# Altium PCB PCB_ClockLed.PcbDoc
Units mil, origin at the board's own origin, x right, y up, seen from the top; angles counter-clockwise.
Board outline 6000 x 4000 mil, 2 copper layers (Top Layer, Bottom Layer); 70 components, 62 nets, 260 pads, 2 vias.
Unrouted connection lines stored in the file: 184.
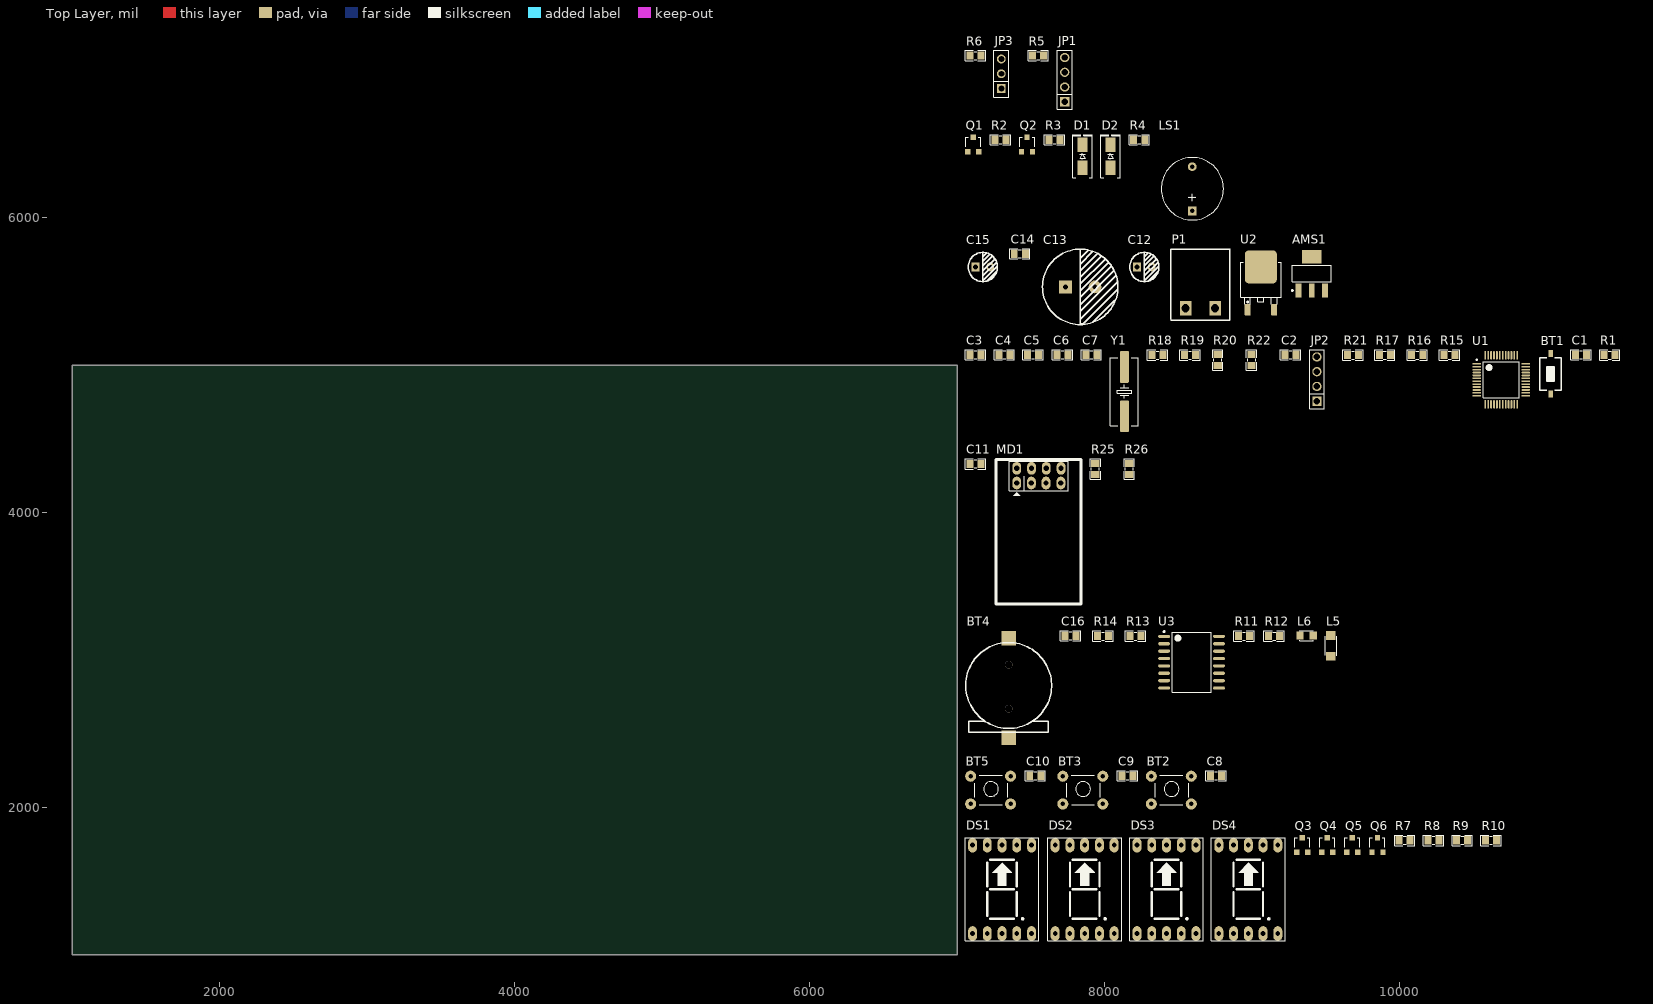
[diagram p0: Top Layer view]
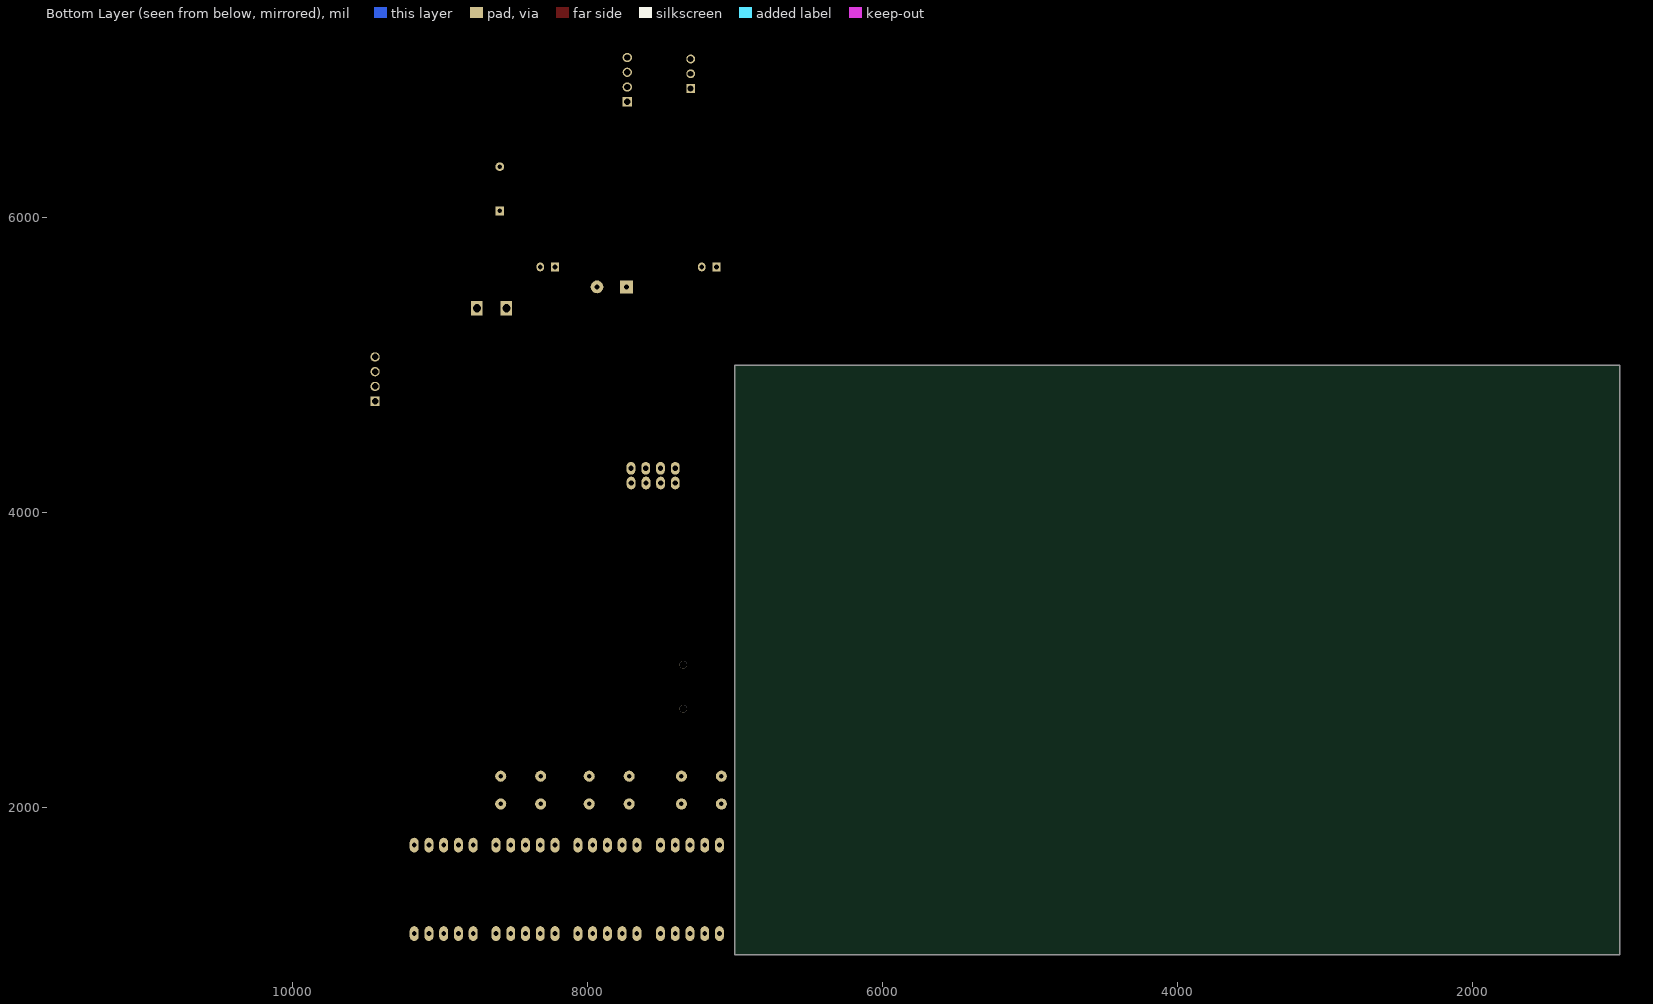
[diagram p1: Bottom Layer view, seen from below]

## Layer stack, top to bottom
Top Solder: solder mask 0.4, Solder Resist, Dk 3.5
Top Layer: signal copper 1.4
Dielectric 1: dielectric 12.6, FR-4, Dk 4.8
Bottom Layer: signal copper 1.4
Bottom Solder: solder mask 0.4, Solder Resist, Dk 3.5

## Board outline
1000,1000 7000,1000 7000,5000 1000,5000

## Design rules (kind name [scope] priority, off if disabled: settings)
Clearance [All] p1: gap=10 ignorepadtopadclearanceinfootprint=FALSE except(0: Arc-Hole Track-Hole SMDPad-Hole THPad-Hole Via-Hole Fill-Hole Poly-Hole Region-Hole Text-Hole)
PolygonConnect [All] p1: connectstyle=Relief reliefconductorwidth=10 reliefentries=4 polygonreliefangle="90 Angle" airgapwidth=10
RoutingVias [All] p1: holewidth=28 width=50 viastyle="Through Hole" minholewidth=28 minwidth=50 maxholewidth=28 maxwidth=50
SolderMaskExpansion [All] p1: expansion=4 istentingtop=FALSE
Width [All] p1: maxlimit=10 minlimit=10 preferedwidth=10
30 further rules are at their usual default settings.

## Classes and differential pairs
component class SenSor_ClockLed: JP1 JP3 R5 R6
component class Relay_ClockLed: D1 D2 LS1 Q1 Q2 R2 R3 R4 RL1
component class Power_ClockLed: AMS1 C12 C13 C14 C15 P1 U2
component class MCU_Clock_Led: BT1 C1 C2 C3 C4 C5 C6 C7 JP2 R1 R15 R16 R17 R18 R19 R20 R21 R22 U1 Y1
component class ESP8266_ClockLed: C11 MD1 R25 R26
component class DS3231_ClockLed: BT4 C16 L5 L6 R11 R12 R13 R14 U3
component class Button_ClockLed: BT2 BT3 BT5 C8 C9 C10
component class 7SEG_ClockLed: DS1 DS2 DS3 DS4 Q3 Q4 Q5 Q6 R7 R8 R9 R10

## Components (designator, comment, footprint, x,y, rotation, side; value= is the part's Value field where it differs from the comment)
AMS1 "AMS1117-3.3V" SOT223 9405,5620 r0 top value="AMS1117-3.3V SOT223"
BT1 "Nut Nhan 2 Chan SMD 3x6x2.5" "Nut Nhan 2 Chan SMD 3x6x2.5" 11025,4940 r90 top
BT2 "Nut Nhan 4 Chan Cam 6x6" "Nut Nhan 4 Chan Cam 6x6" 8330,2220 r0 top
BT3 "Nut Nhan 4 Chan Cam 6x6" "Nut Nhan 4 Chan Cam 6x6" 7730,2220 r0 top
BT4 "CR1220 SMD" "DE PIN CR1220" 7350,2810 r0 top
BT5 "Nut Nhan 4 Chan Cam 6x6" "Nut Nhan 4 Chan Cam 6x6" 7105,2220 r0 top
C1 "104" "tu 0805" 11230,5070 r0 top
C2 "22pF" "tu 0805" 9260,5070 r0 top
C3 "104" "tu 0805" 7125,5070 r0 top
C4 "104" "tu 0805" 7320,5070 r0 top
C5 "104" "tu 0805" 7515,5070 r0 top
C6 "104" "tu 0805" 7715,5070 r0 top
C7 "22pF" "tu 0805" 7910,5070 r0 top
C8 "104" "tu 0805" 8755,2215 r0 top
C9 "104" "tu 0805" 8155,2215 r0 top
C10 "104" "tu 0805" 7530,2215 r0 top
C11 "104" "tu 0805" 7125,4330 r0 top
C12 "0.33uF" "tu hoa 5mm" 8270,5665 r0 top
C13 "10uF" "tu hoa 13mm" 7835,5530 r0 top
C14 "104" "tu 0805" 7425,5755 r0 top
C15 "22uF" "tu hoa 5mm" 7175,5665 r0 top
C16 "104" "tu 0805" 7770,3165 r0 top
D1 "M7" "DIODE SMA" 7850,6415 r90 top
D2 "M7" "DIODE SMA" 8040,6415 r90 top
DS1 "7SEG S" 7SEGS 7105,1145 r0 top value="LED 7S SEG"
DS2 "7SEG S" 7SEGS 7665,1145 r0 top value="LED 7S SEG"
DS3 "7SEG S" 7SEGS 8220,1145 r0 top value="LED 7S SEG"
DS4 "7SEG S" 7SEGS 8775,1145 r0 top value="LED 7S SEG"
JP1 "JP 1x4 2.54" "JP 1x4 DT" 7730,6785 r90 top
JP2 "JP 1x4 2.54" "JP 1x4 DT" 9440,4755 r90 top
JP3 "JP 1x3 2.54" "JP 1x3 CT" 7300,6875 r90 top
L5 "LED 0805" LED-1206-Yellow 9535,3025 r90 top
L6 "LED 0805" LED-0805-Blue 9325,3165 r0 top
LS1 "Coi Chip Speaker" "Coi Chip Speacker" 8595,6045 r90 top
MD1 "ESP8266 Module" "ESP2866 Module" 7405,4200 r0 top
P1 "CON 2 EDG5.08" "CON 2 2EDG5.08" 8550,5385 r0 top
Q1 "HF" SOT23 7110,6495 r0 top value=C9014
Q2 "HF" SOT23 7475,6495 r0 top value=C9014
Q3 "HF" SOT23 9340,1745 r0 top value=C9014
Q4 "HF" SOT23 9510,1745 r0 top value=C9014
Q5 "HF" SOT23 9680,1745 r0 top value=C9014
Q6 "HF" SOT23 9850,1745 r0 top value=C9014
R1 "10k" "tro smd 0805" 11425,5070 r0 top
R2 "100R" "tro smd 0805" 7295,6530 r0 top
R3 "100R" "tro smd 0805" 7660,6530 r0 top
R4 "100R" "tro smd 0805" 8235,6530 r0 top
R5 "4.7k" "tro smd 0805" 7550,7100 r0 top
R6 "4.7k" "tro smd 0805" 7125,7100 r0 top
R7 "100R" "tro smd 0805" 10035,1780 r0 top
R8 "100R" "tro smd 0805" 10230,1780 r0 top
R9 "100R" "tro smd 0805" 10425,1780 r0 top
R10 "100R" "tro smd 0805" 10620,1780 r0 top
R11 "4.7k" "tro smd 0805" 8945,3165 r0 top
R12 "4.7k" "tro smd 0805" 9150,3165 r0 top
R13 "4.7k" "tro smd 0805" 8210,3165 r0 top
R14 "4.7k" "tro smd 0805" 7990,3165 r0 top
R15 "10k" "tro smd 0805" 10340,5070 r0 top
R16 "10k" "tro smd 0805" 10120,5070 r0 top
R17 "10k" "tro smd 0805" 9900,5070 r0 top
R18 "10k" "tro smd 0805" 8360,5070 r0 top
R19 "10k" "tro smd 0805" 8580,5070 r0 top
R20 "10k" "tro smd 0805" 8765,5035 r90 top
R21 "10k" "tro smd 0805" 9685,5070 r0 top
R22 "10k" "tro smd 0805" 8995,5035 r90 top
R25 "10k" "tro smd 0805" 7935,4295 r90 top
R26 "10k" "tro smd 0805" 8165,4295 r90 top
U1 "STM32F103xx_LQFP48" STM32_LQPF48 10690,4900 r0 top
U2 "78M05 SMD TO252" TO252 9060,5520 r0 top
U3 "DS3231 SMD" "SOIC 16" 8590,2985 r0 top
Y1 "16Mhz" "Thach Anh 2 chan SMD" 8135,4820 r90 top value=4Mhz

## Footprints (in the part's own frame and the unit in brackets; to place one, negate y for a bottom-side part, rotate by r counter-clockwise, add the part's x,y. Pads: shape width x height; smd on the part's side, far side on the other; paste and mask are expansions set on the pad)
7SEGS [mil] "DIP 10 Leads; Body 12 x 15 mm; Pitch 0.5 mm"
  oval 60x100 hole 32: 1(0,0) 2(100,0) 3(200,0) 4(300,0) 5(400,0) 6(400,600) 7(300,600) 8(200,600) 9(100,600) 10(0,600)
  silkscreen extent -50,-50 450,650, body extent -50,-75 450,675, height 316
"Coi Chip Speacker" [mm]
  rect 1.5x1.5 hole 0.8: 1(0,0)
  round 1.5 hole 0.8: 2(7.62,0.013)
  silkscreen extent -1.55,-5.38 9.18,5.36, body extent -2.22,-6 13.24,6, height 4.5
"CON 2 2EDG5.08" [mm]
  rect 2x2.5 hole 1.4: 1(0,0) 2(5.08,0)
  silkscreen extent -2.54,-2.03 7.62,10.21, body extent -2.5,-1.75 7.58,10.25, height 3.15
"DE PIN CR1220" [mm]
  rect 2.5x2.5 smd: 1(0,-8.6) 2(0,8.6)
  silkscreen extent -7.39,-7.6 7.4,7.84, body extent -7.39,-9.42 7.36,9.38, height 4.27
"DIODE SMA" [mm] "SMA"
  rect 2.5x1.7 smd: 1(-2,0) 2(2,0)
  silkscreen extent -3.68,-1.65 3.75,1.65, body extent -2.6,-1.37 2.6,1.37, height 2.4
"ESP2866 Module" [mil]
  oval 60x86 hole 36: 1(0,0) 2(99,0) 3(198,0) 4(299,0) 5(0,100) 6(100,100) 7(199.5,100) 8(300,100)
  silkscreen extent -140,-820 435,159, body extent -137,-817 433,159, height 231
"JP 1x3 CT" [mm]
  rect 1.52x1.52 hole 1.02: 1(0,0)
  round 1.52 hole 1.02: 2(2.54,0) 3(5.08,0)
  silkscreen extent -1.52,-1.27 6.6,1.27, body extent -1.52,-1.25 6.6,1.25, height 8.51
"JP 1x4 DT" [mm] "4 pins, 1 row, straight, gold plating"
  rect 1.6x1.6 hole 1.1: 1(0,0)
  round 1.6 hole 1.1: 2(2.54,0) 3(5.08,0) 4(7.62,0)
  silkscreen extent -1.27,-1.27 8.89,1.27, body extent -1.27,-1.27 8.89,1.27, height 8.54
LED-0805-Blue [mil]
  rect 50x55 smd: 1(0,0) 2(90,0)
  silkscreen extent 0,-35 90,35, body extent 5,-25 85,25, height 43
LED-1206-Yellow [mil]
  rect 60x65 smd: 1(0,0) 2(142,0)
  silkscreen extent 6,-40 136,40, body extent 7,-31 133,32, height 43
"Nut Nhan 2 Chan SMD 3x6x2.5" [mm] "Switch SMD type"
  rect 1.2x0.8 smd: 1(-3.5,0) 2(3.5,0)
  silkscreen extent -2.82,-1.85 2.82,1.85, body extent -3.05,-1.85 3.05,1.85, height 2.5
"Nut Nhan 4 Chan Cam 6x6" [mil] "SW button 4pin, 250 x250 mil"
  round 75 hole 31: 1(-13,-8) 1(258,-8) 2(-13,-196) 2(258,-196)
  silkscreen extent 15,-215 240,0, body extent -31,-225 281,19, height 276
"SOIC 16" [mm] "SOIC, 16-Leads, Body 10.30x7.50mm, Pitch 1.27mm, IPC Medium Density"
  oval 2.032x0.55 smd: 1(-4.725,4.445) 2(-4.725,3.175) 3(-4.725,1.905) 4(-4.725,0.635) 5(-4.725,-0.635) 6(-4.725,-1.905) 7(-4.725,-3.175) 8(-4.725,-4.445) 9(4.725,-4.445) 10(4.725,-3.175) 11(4.725,-1.905) 12(4.725,-0.635) 13(4.725,0.635) 14(4.725,1.905) 15(4.725,3.175) 16(4.725,4.445)
  silkscreen extent -4.85,-5.15 3.35,5.39, body extent -5.15,-5.17 5.16,5.16, height 2.48
SOT23 [mm] "SOT23"
  rect 0.9x0.95 smd: 1(-0.95,-1.25) 2(0,1.25)
  rect 0.9x0.95 smd mask+0: 3(0.95,-1.25)
  silkscreen extent -1.3,-0.38 1.3,1.25, body extent -1.52,-1.23 1.48,1.27, height 1.06
SOT223 [mm]
  rect 1x2.4 smd: 1(-2.3,-2.9) 2(0,-2.9) 3(2.3,-2.9)
  rect 3.3x2.4 smd: 4(0,2.9)
  silkscreen extent -3.47,-3.02 3.35,1.4, body extent -3.25,-3.56 3.25,3.4, height 1.68
STM32_LQPF48 [mm]
  oval 1.45x0.3 smd: 1(-4.225,2.75) 2(-4.225,2.25) 3(-4.225,1.75) 4(-4.225,1.25) 5(-4.225,0.75) 6(-4.225,0.25) 7(-4.225,-0.25) 8(-4.225,-0.75) 9(-4.225,-1.25) 10(-4.225,-1.75) 11(-4.225,-2.25) 12(-4.225,-2.75) 25(4.225,-2.75) 26(4.225,-2.25) 27(4.225,-1.75) 28(4.225,-1.25) 29(4.225,-0.75) 30(4.225,-0.25) 31(4.225,0.25) 32(4.225,0.75) 33(4.225,1.25) 34(4.225,1.75) 35(4.225,2.25) 36(4.225,2.75)
  oval 0.3x1.45 smd: 13(-2.75,-4.225) 14(-2.25,-4.225) 15(-1.75,-4.225) 16(-1.25,-4.225) 17(-0.75,-4.225) 18(-0.25,-4.225) 19(0.25,-4.225) 20(0.75,-4.225) 21(1.25,-4.225) 22(1.75,-4.225) 23(2.25,-4.225) 24(2.75,-4.225) 37(2.75,4.225) 38(2.25,4.225) 39(1.75,4.225) 40(1.25,4.225) 41(0.75,4.225) 42(0.25,4.225) 43(-0.25,4.225) 44(-0.75,4.225) 45(-1.25,4.225) 46(-1.75,4.225) 47(-2.25,4.225) 48(-2.75,4.225)
  silkscreen extent -4.35,-3.1 3.1,3.57, body extent -4.5,-4.5 4.5,4.5, height 1.6
"Thach Anh 2 chan SMD" [mm] "SMD Crystal HC49/US-SM package"
  round 0.508 on Mech15: 0(0,0)
  rrect25% 5.5x1.5 smd: 1(-4.25,0) 2(4.25,0)
  silkscreen extent -5.84,-2.41 5.84,2.41, body extent -6.4,-2.41 6.4,2.42, height 4.29
TO252 [mm] "TO252"
  round 0.5 on Mech15: 0(0,0)
  rrect25% 1x2 smd: 1(-2.285,-3.7) 3(2.285,-3.7)
  rrect25% 5.5x5.7 smd: 2(0,3.7)
  silkscreen extent -3.5,-2.7 3.5,4.5, body extent -3.3,-3.95 3.3,5.76, height 2.31
"tro smd 0805" [mm]
  rect 1.2x1.4 smd: 1(-0.946,-0.061) 2(0.954,-0.061)
  silkscreen extent -1.75,-0.97 1.75,0.84, body extent -1.56,-0.76 1.44,0.64, height 0.53
"tu 0805" [mm] "Compoment SMD 80x50mil"
  rect 1.2x1.4 smd: 1(-0.946,-0.003) 2(0.954,-0.003)
  silkscreen extent -1.75,-0.89 1.75,0.89, body extent -1.01,-0.64 1.01,0.63, height 0.61
"tu hoa 5mm" [mm]
  rect 1.3x1.5 hole 0.8: 1(-1.27,0)
  oval 1.3x1.5 hole 0.8: 2(1.27,0)
  silkscreen extent -2.51,-2.51 2.51,2.51, body extent -3.12,-3.18 3.23,3.18, height 14.55
"tu hoa 13mm" [mm]
  rect 2.2x2.2 hole 0.9: 1(-2.54,0)
  round 2.2 hole 0.9: 2(2.54,0)
  silkscreen extent -6.5,-6.5 6.5,6.5, body extent -6.25,-6.25 6.26,6.25, height 23.02

## Part data
AMS1: library part "AMS1117 SMD", "Dán", Chung_Loai=Dán, Don_Vi=Con, Ma_Hang=MH000596
BT2 BT3 BT5: "Nut Nhan 4 Chan 6x6mm", Ma_Hang=MH004584, Ten="Nút Nhấn 4 Chân 6x6x5MM DIP"
BT4: library part "De pin CR1220 SMD", Ma_Hang=MH000833, Ten="Đế PIN CR1220 SMD"
C1 C3 C4 C5 C6 C8 C9 C10 C11 C14 C16: library part "Tu 0805 104 50V 10%", "Dán", Chung_Loai=Dán, Don_Vi=Con, Ma_Hang=MH004551, So_Chan=2, Ten_Linh_Kien="Tụ 0805 104-100nF 10% 50V"
C2 C7: library part "Tu 0805 22pF 50V 10%", "Dán", Chung_Loai=Dán, Don_Vi=Con, Ma_Hang=MH004560, So_Chan=2, Ten_Linh_Kien="Tụ 0805 22P 10% 50V"
C12: library part "Tu Hoa 0.33uF 50V 5x11", "Cắm", Chung_Loai=Cắm, Don_Vi=Con, Ma_Hang=MH004655, So_Chan=2, Ten_Linh_Kien="Tụ Hóa 0.33uF 50V 5x11MM"
C13: library part "Tu Hoa 10uF 450V 13x20", "Cắm", Chung_Loai=Cắm, Don_Vi=Con, Ma_Hang=MH003950, So_Chan=2, Ten_Linh_Kien="Tụ Hóa 10uF 450V 13x20MM"
C15: library part "Tu Hoa 22uF 35V 5x11", "Cắm", Chung_Loai=Cắm, Don_Vi=Con, Ma_Hang=MH001350, So_Chan=2, Ten_Linh_Kien="Tụ Hóa 22uF 35V 5x11MM"
D1 D2: library part "Diode M7 ( 4007 )", "Dán", Chung_Loai=Dán, Don_Vi=Con, Ma_Hang=MH000944, Ten_Linh_Kien="Diode M7 1N4007 SMD 1A 1000V"
DS1 DS2 DS3 DS4: library part LED7S, "Single 7 Seg Dipslay"
JP1 JP2: library part "JP 1x4 2.54 Duc Thang", "Cắm", Chung_Loai=Cắm, Don_Vi=Con, Ma_Hang=MH000903, Ten_Linh_Kien="Jump Đơn Đực 2.54MM 1x40P Thẳng 11MM"
JP3: library part "JP 1x3 2.54 Cai Thang", "Cắm", Chung_Loai=Cắm, Don_Vi=Con, Ma_Hang=MH004006, Ten_Linh_Kien="Jump Đơn Cái 2.54MM 1x20P Thẳng"
L5: library part "LED 1206 Vang", "Dán", Chung_Loai=Dán, Don_Vi=Con, Ma_Hang=MH002331, Ten_Linh_Kien="LED1206 Màu Vàng (Yellow)"
L6: library part "LED 0805 Xanh Duong", "Dán", Chung_Loai=Dán, Don_Vi=Con, Ma_Hang=MH002327, Ten_Linh_Kien="LED 0805 Màu Xanh Dương (Blue)"
LS1: "Còi chip"
P1: "Cắm", Chung_Loai=Cắm, Don_Vi=Con, Ma_Hang=MH000759, Ten_Linh_Kien="CON 2 2EDG5.08-2P 5.08MM ( Xanh Cong)"
Q1 Q2 Q3 Q4 Q5 Q6: library part "C1815 HF SMD", "NPN transistor"
R1 R15 R16 R17 R18 R19 R20 R21 R22 R25 R26: library part "Tro 0805 5% 10k", "Dán", Chung_Loai=Dán, Don_Vi=Con, Ma_Hang=MH005239, So_Chan=2, Ten_Linh_Kien="Trở 0805 5% 10k"
R2 R3 R4 R7 R8 R9 R10: library part "Tro 0805 5% 100R", "Dán", Chung_Loai=Dán, Don_Vi=Con, Ma_Hang=MH005251, So_Chan=2, Ten_Linh_Kien="Trở 0805 5% 100R"
R5 R6 R11 R12 R13 R14: library part "Tro 0805 5% 4.7k", "Dán", Chung_Loai=Dán, Don_Vi=Con, Ma_Hang=MH005307, So_Chan=2, Ten_Linh_Kien="Trở 0805 5% 4.7k"
U2: "Dán", Chung_Loai=Dán, Don_Vi=Con, Ma_Hang=MH001917, Ten_Linh_Kien="78M05 TO252"
U3: "SOIC"
Y1: library part "Thach Anh 2 chan SMD", "Crystal For all Crystal 2pin."
BT1: Ma_Hang=MH001036, Ten="Nút Nhấn 2 Chân 3x6x2.5MM SMD"
U1: ComponentLink1Description="Manufacturer Link", ComponentLink1URL=www.st.com/stm32, ComponentLink2Description=Datasheet, ComponentLink2URL=http://www.st.com/stonline/products/literature/ds/13587.pdf, DatasheetVersion="rev6, Mar-2008", PackageDescription="48-Pin Low-Profile Quad Flat Pack, 7 x 7 mm Body, 0.5 mm Pitch (LQFP48)", PackageReference=LQFP48, PackageVersion=Mar-2008, Published=30-May-2008, Publisher="Altium Limited"

## Via types
v1: diameter 50, hole 50, Top Layer to Bottom Layer, 2 vias

## Nets (pads, with @x,y where several pads share a name; then routed paths per layer and width w, separated by ;. In a path a pad name is that pad's centre, name@x,y a point inside that pad or via, vN(x,y) a via of type N, cw(c..) or ccw(c..) an arc to the next point about the centre after c; other vN are vias at no path point)
3.3V: AMS1.2 AMS1.4 C3.1 C4.1 C5.1 C6.1 C11.2 C15.1 JP1.1 JP2.1 JP3.1 L5.2 L6.2 MD1.5 MD1.6 MD1.7 Q3.3 Q4.3 Q5.3 Q6.3 R5.1 R6.1 R11.2 R12.2 R25.1 R26.1 U1.9 U1.24 U1.36 U1.48 U3.2
5V: D1.2 D2.2 LS1.1
+5: AMS1.3 C13.1 C14.1 U2.3
+12: C12.1 P1.1 R4.2 U2.1
GND: AMS1.1 BT1.1 BT2.1 BT2.2 BT3.2 BT4.2 BT5.2 C1.2 C2.1 C3.2 C4.2 C5.2 C6.2 C7.1 C8.1 C8.2 C9.2 C10.1 C11.1 C12.2 C13.2 C14.2 C15.2 C16.2 JP1.4 JP2.4 JP3.3 MD1.4 P1.2 Q1.2 Q2.2 R1.2 U1.8 U1.23 U1.26 U1.35 U1.47 U2.2 U3.5 U3.6 U3.7 U3.8 U3.9 U3.10 U3.11 U3.12 U3.13
NetBT3_1: BT3.1 C9.1 U1.27
NetBT4_1: BT4.1 C16.1 U3.14
NetBT5_1: BT5.1 C10.2 U1.28
NetD1_1: D1.1 Q1.3
NetD2_1: D2.1 LS1.2 Q2.3
NetDS1_1: DS1.1 DS2.1 DS3.1 DS4.1 R19.1
NetDS1_2: DS1.2 DS2.2 DS3.2 DS4.2 R18.1
NetDS1_3: DS1.3 DS1.8 Q3.2
NetDS1_4: DS1.4 DS2.4 DS3.4 DS4.4 R17.1
NetDS1_5: DS1.5 DS2.5 DS3.5 DS4.5 R22.1
NetDS1_6: DS1.6 DS2.6 DS3.6 DS4.6 R16.1
NetDS1_7: DS1.7 DS2.7 DS3.7 DS4.7 R15.1
NetDS1_9: DS1.9 DS2.9 DS3.9 DS4.9 R20.1
NetDS1_10: DS1.10 DS2.10 DS3.10 DS4.10 R21.1
NetDS2_3: DS2.3 DS2.8 Q4.2
NetDS3_3: DS3.3 DS3.8 Q5.2
NetDS4_3: DS4.3 DS4.8 Q6.2
NetJP1_2: JP1.2 R5.2 U1.33
NetJP3_2: JP3.2 R6.2 U1.32
NetL5_1: L5.1 L6.1 R13.1 R14.1
NetMD1_1: MD1.1 U1.30
NetMD1_2: MD1.2 R25.2
NetMD1_3: MD1.3 R26.2
NetMD1_8: MD1.8 U1.31
NetQ1_1: Q1.1 R2.2
NetQ2_1: Q2.1 R3.2
NetQ3_1: Q3.1 R7.2
NetQ4_1: Q4.1 R8.2
NetQ5_1: Q5.1 R9.2
NetQ6_1: Q6.1 R10.2
NetR1_1: R1.1 U1.44
NetR2_1: R2.1 U1.22
NetR3_1: R3.1
NetR4_1: R4.1
NetR7_1: R7.1 U1.18
NetR8_1: R8.1 U1.19
NetR9_1: R9.1 U1.20
NetR10_1: R10.1 U1.21
NetR11_1: R11.1 U1.42 U3.15
NetR12_1: R12.1 U3.16
NetR13_2: R13.2 U3.1
NetR14_2: R14.2 U3.3
NetR15_2: R15.2 U1.10
NetR16_2: R16.2 U1.11
NetR17_2: R17.2 U1.12
NetR18_2: R18.2 U1.13
NetR19_2: R19.2 U1.14
NetR20_2: R20.2 U1.15
NetR21_2: R21.2 U1.16
NetR22_2: R22.2 U1.17
NetU1_25: U1.25
NetU1_43: U1.43
NRST: BT1.2 C1.1 U1.7 U3.4
OCS1: C2.2 U1.5 Y1.2
OCS2: C7.2 U1.6 Y1.1
SWCLK: JP2.3 U1.37
SWDIO: JP2.2 U1.34
pads on no net: JP1.3 U1.1 U1.2 U1.3 U1.4 U1.29 U1.38 U1.39 U1.40 U1.41 U1.45 U1.46 U2.0 Y1.0
copper on no net:
  other v1: 7350.2,2669.1 7350,2968.5

## Text inside footprints (layer, text, board x,y; h text height)
LS1: Top Overlay "+" at 8623,6100.5 h60 r90